# Altium PCB Load.PcbDoc
Units mil, origin at the board's own origin, x right, y up, seen from the top; angles counter-clockwise.
Board outline 5010 x 2170 mil, 2 copper layers (Top Layer, Bottom Layer); 28 components, 12 nets, 56 pads, 0 vias.
Unrouted connection lines stored in the file: 44.
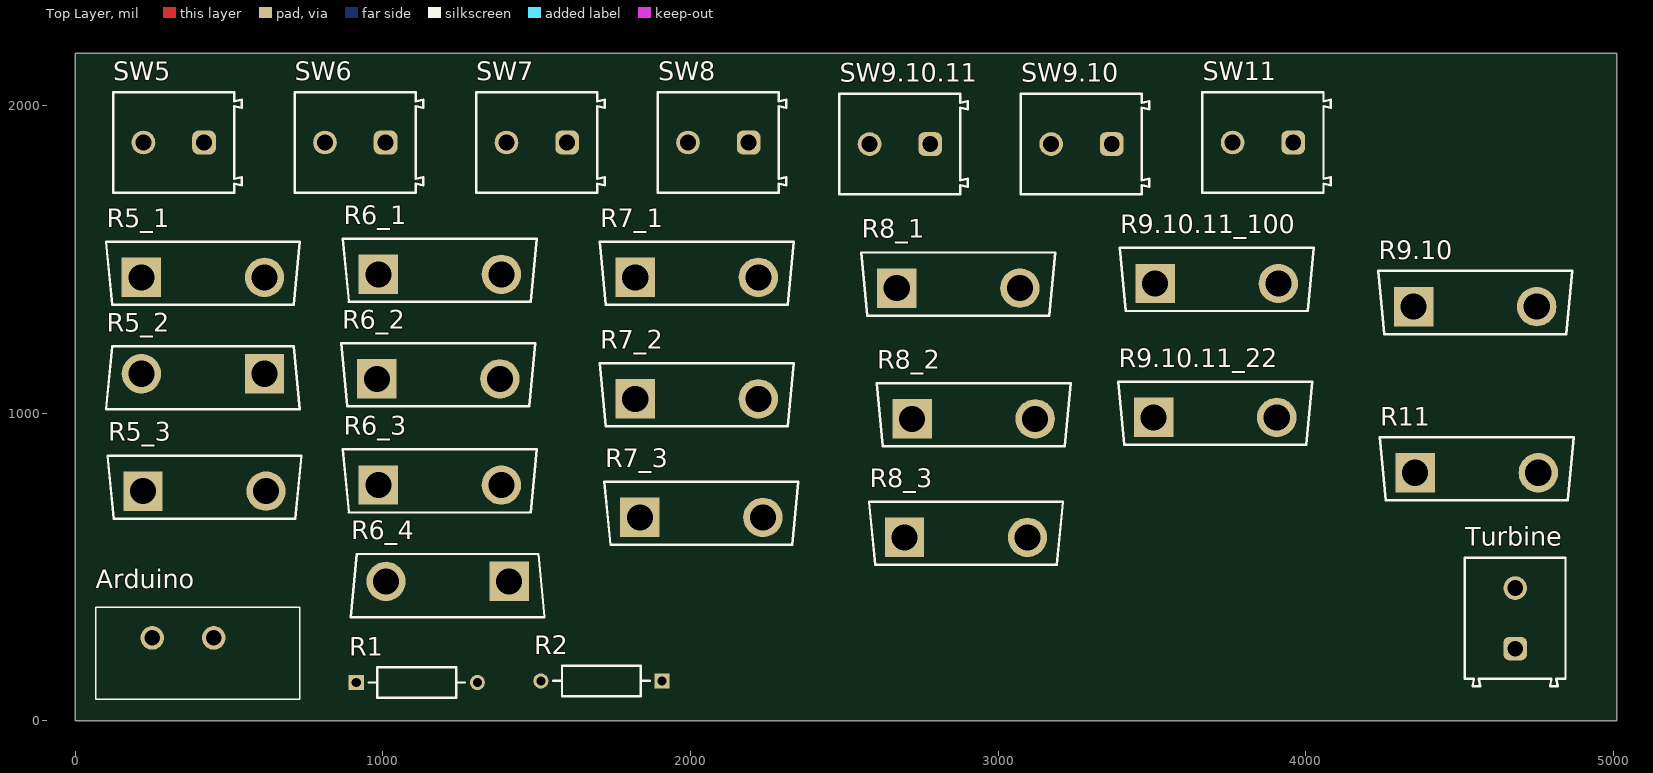
[diagram p0: Top Layer view]
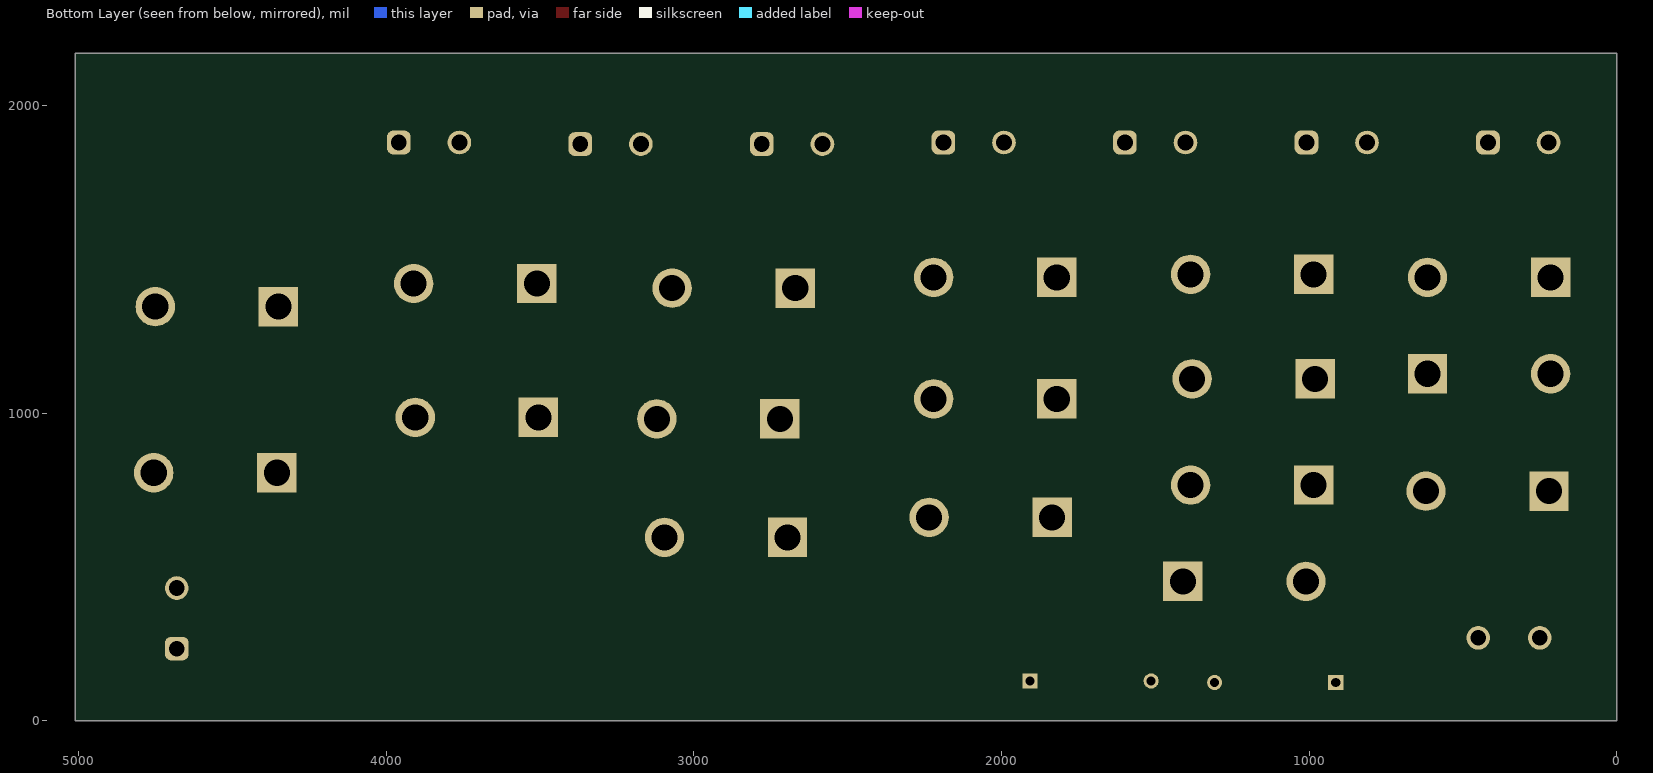
[diagram p1: Bottom Layer view, seen from below]

## Layer stack, top to bottom
Top Solder: solder mask 0.4, Solder Resist, Dk 3.5
Top Layer: signal copper 1.4
Dielectric 1: dielectric 12.6, FR-4, Dk 4.8
Bottom Layer: signal copper 1.4
Bottom Solder: solder mask 0.4, Solder Resist, Dk 3.5

## Board outline
0,0 5010,0 5010,2170 0,2170

## Design rules (kind name [scope] priority, off if disabled: settings)
Clearance [All] p1: gap=10 ignorepadtopadclearanceinfootprint=FALSE
PolygonConnect [All] p1: connectstyle=Relief reliefconductorwidth=10 reliefentries=4 polygonreliefangle="90 Angle" airgapwidth=10
RoutingVias [All] p1: holewidth=28 width=50 viastyle="Through Hole" minholewidth=28 minwidth=50 maxholewidth=28 maxwidth=50
SolderMaskExpansion [All] p1: expansion=4 istentingtop=FALSE
Width [All] p1: maxlimit=10 minlimit=10 preferedwidth=10
30 further rules are at their usual default settings.

## Classes and differential pairs
component class Load: Arduino R5_1 R5_2 R5_3 R6_1 R6_2 R6_3 R6_4 R9.10 R9.10.11_22 R9.10.11_100 R11 SW9.10.11

## Components (designator, comment, footprint, x,y, rotation, side; value= is the part's Value field where it differs from the comment)
Arduino "1706730" PHOENIX_1706730 66.93,370 r270 top
R1 "" FP-MRS25-MFG 1110,125 r0 top
R2 "" FP-MRS25-MFG 1710,130 r180 top
R5_1 "TEH100M50R0FE" FP-TEH100-MFG 415,1455 r90 top
R5_2 "TEH100M50R0FE" FP-TEH100-MFG 415,1115 r270 top
R5_3 "TEH100M50R0FE" FP-TEH100-MFG 420,760 r90 top
R6_1 "TEH100M50R0FE" FP-TEH100-MFG 1185,1465 r90 top
R6_2 "TEH100M50R0FE" FP-TEH100-MFG 1180,1125 r90 top
R6_3 "TEH100M50R0FE" FP-TEH100-MFG 1185,780 r90 top
R6_4 "TEH100M50R0FE" FP-TEH100-MFG 1210,440 r270 top
R7_1 "TEH100M50R0FE" FP-TEH100-MFG 2020,1455 r90 top
R7_2 "TEH100M50R0FE" FP-TEH100-MFG 2020,1060 r90 top
R7_3 "TEH100M50R0FE" FP-TEH100-MFG 2035,675 r90 top
R8_1 "TEH100M50R0FE" FP-TEH100-MFG 2870,1420 r90 top
R8_2 "TEH100M50R0FE" FP-TEH100-MFG 2920,995 r90 top
R8_3 "TEH100M50R0FE" FP-TEH100-MFG 2895,610 r90 top
R9.10 "TEH100M50R0FE" FP-TEH100-MFG 4550,1360 r90 top
R9.10.11_22 "TEH100M50R0FE" FP-TEH100-MFG 3705,1000 r90 top
R9.10.11_100 "TEH100M50R0FE" FP-TEH100-MFG 3710,1435 r90 top
R11 "TEH100M50R0FE" FP-TEH100-MFG 4555,820 r90 top
SW5 "691213710002" 691213710002 320,1880 r180 top
SW6 "691213710002" 691213710002 910,1880 r180 top
SW7 "691213710002" 691213710002 1500,1880 r180 top
SW8 "691213710002" 691213710002 2090,1880 r180 top
SW9.10 "691213710002" 691213710002 3270,1875 r180 top
SW9.10.11 "691213710002" 691213710002 2680,1875 r180 top
SW11 "691213710002" 691213710002 3860,1880 r180 top
Turbine "691213710002" 691213710002 4680,333.42 r90 top

## Footprints (in the part's own frame and the unit in brackets; to place one, negate y for a bottom-side part, rotate by r counter-clockwise, add the part's x,y. Pads: shape width x height; smd on the part's side, far side on the other; paste and mask are expansions set on the pad)
691213710002 [mm] "5,00mm - modular - green - Horizontal entry with rising cage clamp -  10,0mm height - 02p"
  rrect50% 1.95x1.95 hole 1.3: 1(-2.5,0)
  round 1.95 hole 1.3: 2(2.5,0)
  silkscreen extent -5.6,-4.15 5,4.15, body extent -5.6,-4.15 5,4.15, height 10.05
FP-MRS25-MFG [mm]
  rect 1.25x1.25 hole 0.75 paste-2539.97 mask+0: 1(-5,0)
  round 1.25 hole 0.75 paste-2539.97 mask+0: 2(5,0)
  silkscreen extent -3.98,-1.25 3.98,1.25, body extent -5.72,-1.35 5.72,1.35, height 0.25
FP-TEH100-MFG [mm]
  rect 3.25x3.25 hole 2.15 paste-2539.97 mask+0: 1(-0.34,5.08)
  round 3.25 hole 2.15 paste-2539.97 mask+0: 2(-0.34,-5.08)
  silkscreen extent -2.61,-8.01 2.61,8.01, body extent -2.71,-8.11 2.71,8.11, height 0.25
PHOENIX_1706730 [mm]
  round 1.95 hole 1.3: 1_1(2.54,9.73) 1_2(2.54,4.65)
  silkscreen extent 0,0 7.62,16.85

## Part data
Arduino: library part CMP-007-000000-1, Package=None, Availability=Unavailable, Component Type=Standard, Design Item ID=1706730, MF="{'manufacturer': u'Phoenix Contact'}", MP=1706730, Pin Count=2, Price=None, Source=1706730.SchLib
R1 R2: library part CMP-00030-42757237-1, "MRS25000C1000FRP00 Resistor, 100 Ohm, ± 1%, 600 mW, Axial Leaded, Metal Film (Thin Film), Professional", Case/Package=Axial, Max Operating Temperature=155°C, Max Power Dissipation=600mW, Min Operating Temperature=-55°C, Resistance=100Ω, Temperature Coefficient=50ppm/°C, Tolerance=1%, Voltage Rating=350V, Composition="Metal Film, Thin Film", Contact Plating=Tin, Diameter=2.5mm, Lead Diameter=600µm, Lead Free="Lead Free", Length=6.5mm, Military Standard=Not, Mount="Through Hole", NexarPartId=42757237, Number of Pins=2, Number of Terminations=2, Packaging="Tape & Reel (TR)", Power Rating=600mW, Radiation Hardening=No, REACH SVHC=Unknown, RoHS=Compliant, Schedule B="8533210090, 8533210090", Termination=Axial, Voltage Rating (DC)=350V, Width=2.5mm
R5_1 R5_2 R5_3 R6_1 R6_2 R6_3 R6_4 R7_1 R7_2 R7_3 R8_1 R8_2 R8_3 R9.10 R9.10.11_22 R9.10.11_100 R11: library part CMP-00273-12698265-1, "TEH100M50R0FE Resistor, Thick Film, Res 50 Ohms, Pwr-Rtg100 W, Tol 1%, Radial, TO-247", Case/Package=TO-247, Max Operating Temperature=175°C, Max Power Dissipation=100W, Min Operating Temperature=25°C, Resistance=50Ω, Temperature Coefficient=50ppm/°C, Tolerance=1%, Voltage Rating=350V, Composition="Thick Film", Depth=5.21mm, Features="Moisture Resistant", Height=20.955mm, Lead Diameter=1.67mm, Lead Pitch=10.42mm, Length=15.748mm, Mount="Through Hole", NexarPartId=12698265, Number of Pins=2, Number of Terminations=2, Packaging=Bulk, Power Rating=100W, REACH SVHC=Unknown, RoHS=Compliant, Terminal Pitch=10.42mm, Termination=Radial, Voltage Rating (DC)=350V, Width=4.953mm
SW5 SW6 SW7 SW8 SW9.10 SW9.10.11 SW11 Turbine: library part CMP-1502-02526-2, Color=Green, Current=10A, Max Operating Temperature=105°C, Min Operating Temperature=-40°C, Voltage=300V, Contact Material=Brass, Contact Plating=Tin, Current Rating=10A, Height=10mm, Housing Material=Nylon, Lead Pitch=5mm, Length=8.3mm, Mount="Through Hole", NexarPartId=8917718, Number of Contacts=2, Number of Levels=1, Number of Pins=2, Number of Positions Per Level=2, Packaging=Box, Pitch=5.0038mm, Plating="Brass, Steel", REACH SVHC=Unknown, RoHS=Compliant, Stripping Length=-7mm, Termination=Screw, Voltage Rating=300V, Width=10.6mm, Wire Gauge (Max)=26AWG, Wire Gauge (Min)=16AWG, Wire/Cable Gauge=26AWG

## Nets (pads, with @x,y where several pads share a name; then routed paths per layer and width w, separated by ;. In a path a pad name is that pad's centre, name@x,y a point inside that pad or via, vN(x,y) a via of type N, cw(c..) or ccw(c..) an arc to the next point about the centre after c; other vN are vias at no path point)
COM: R1.2 R5_1.1 R6_1.1 R6_2.1 R6_3.1 R7_1.1 R8_1.1 R9.10.1 R9.10.11_22.1 R9.10.11_100.1 R11.1 SW5.2 SW6.2 SW7.2 SW8.2 SW9.10.2 SW9.10.11.2 SW11.2
GND: R2.2 R5_3.2 R6_4.2 R7_3.2 R8_3.2 R9.10.2 R9.10.11_22.2 R9.10.11_100.2 R11.2 Turbine.2
NetArduino_1_1: Arduino.1_1 R1.1
NetArduino_1_2: Arduino.1_2 R2.1
NetR5_1_2: R5_1.2 R5_2.1
NetR5_2_2: R5_2.2 R5_3.1
NetR6_1_2: R6_1.2 R6_2.2 R6_3.2 R6_4.1
NetR7_1_2: R7_1.2 R7_2.1
NetR7_2_2: R7_2.2 R7_3.1
NetR8_1_2: R8_1.2 R8_2.1
NetR8_2_2: R8_2.2 R8_3.1
NO: SW5.1 SW6.1 SW7.1 SW8.1 SW9.10.1 SW9.10.11.1 SW11.1 Turbine.1